# Altium PCB LedBlinker End Copper.PcbDoc
Units mil, origin at the board's own origin, x right, y up, seen from the top; angles counter-clockwise.
Board outline 1050 x 1050 mil, 2 copper layers (Top Layer, Bottom Layer), stack 64.8 mil thick; 27 components, 31 nets, 96 pads, 23 vias.
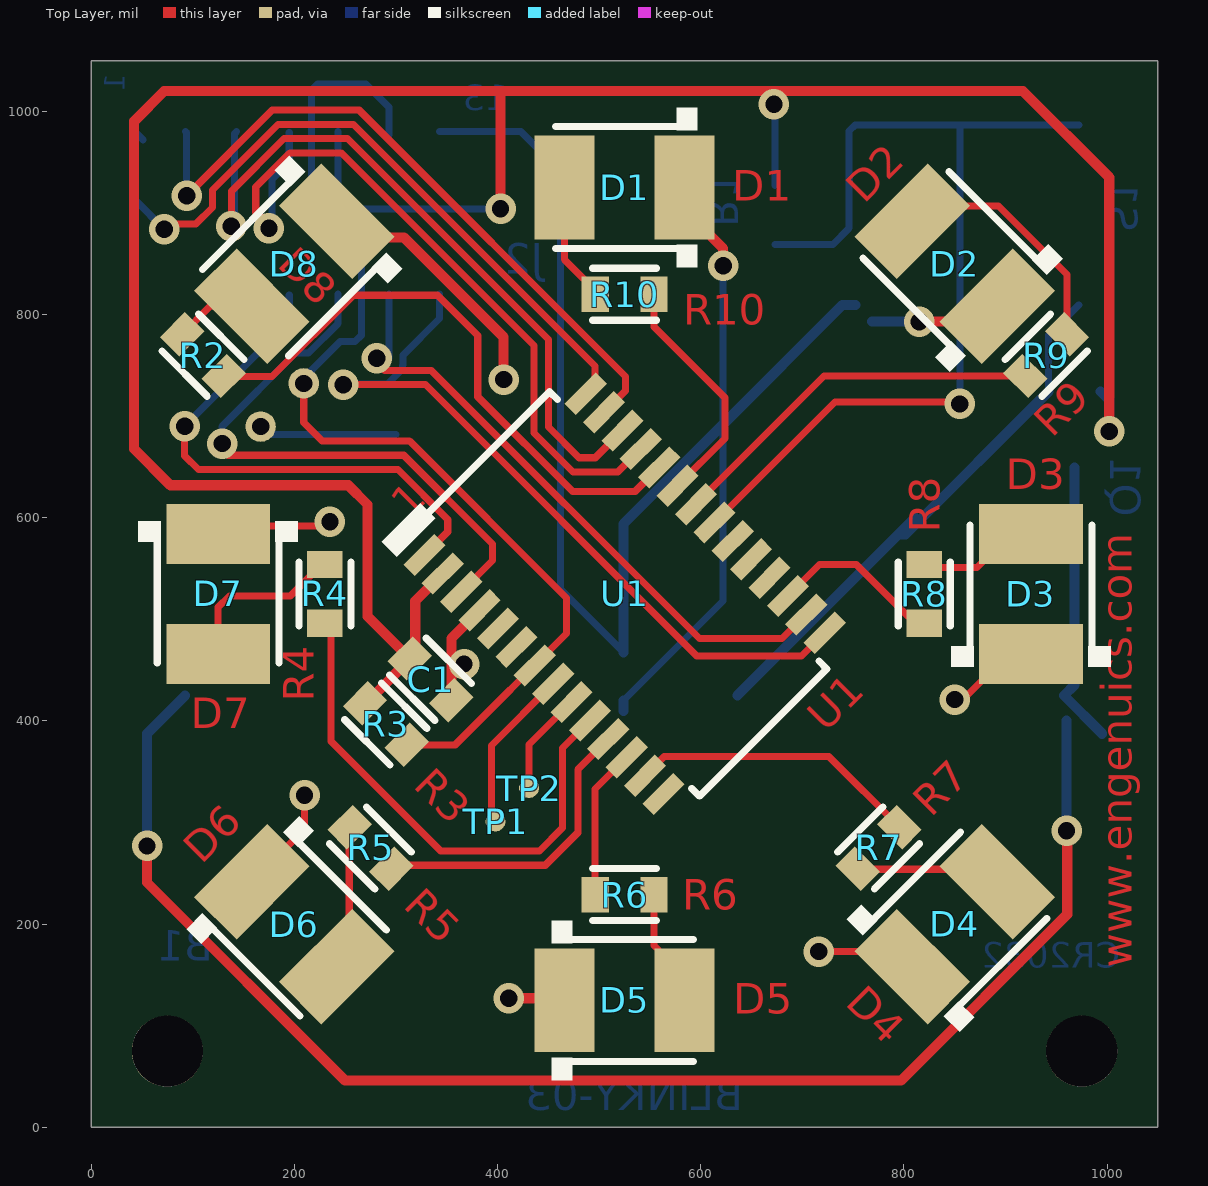
[diagram p0: Top Layer view]
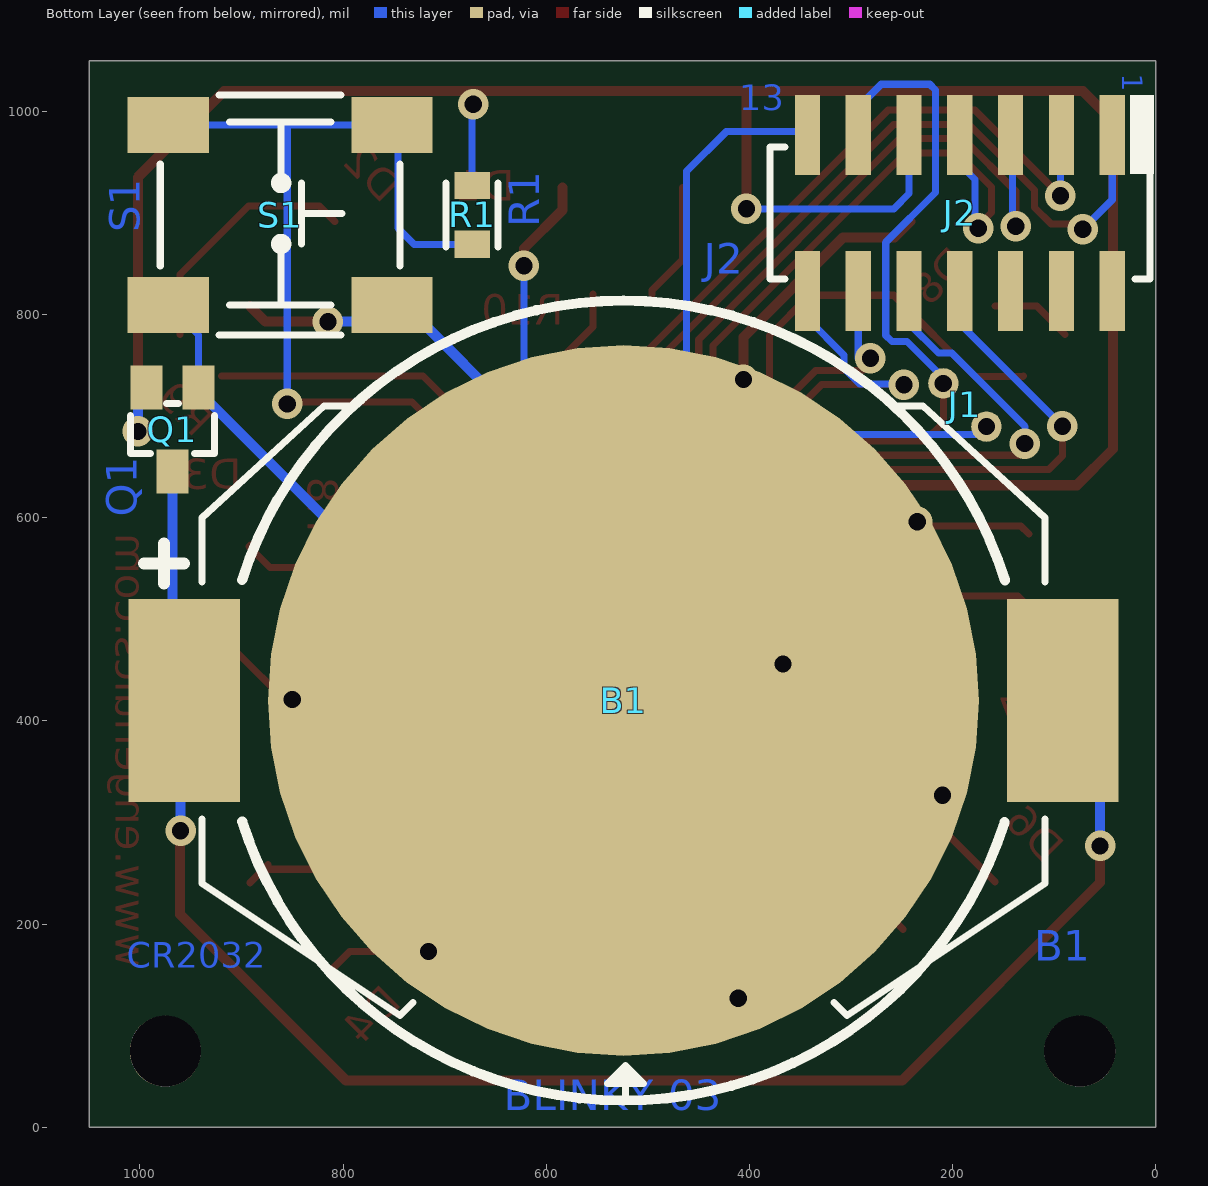
[diagram p1: Bottom Layer view, seen from below]

## Layer stack, top to bottom
Top Layer: signal copper 1.4
Dielectric: core 62, FR-4, Dk 4.8
Bottom Layer: signal copper 1.4

## Board outline
0,0 0,1050 1050,1050 1050,0

## Design rules (kind name [scope] priority, off if disabled: settings)
Clearance ClearancePolygon [All vs InPoly] p1: gap=20
Clearance [All] p2: gap=7
HoleSize [All] p1: absolutevalues=TRUE maxlimit=250 minlimit=17 maxpercent=80.000 minpercent=20.000
MinimumSolderMaskSliver [All] p1 off: minsoldermaskwidth=10
PolygonConnect PolygonConnectVia [All vs IsVia] p1: connectstyle=Direct reliefconductorwidth=10 reliefentries=4 polygonreliefangle="90 Angle" airgapwidth=10
PolygonConnect [All] p2: connectstyle=Relief reliefconductorwidth=10 reliefentries=4 polygonreliefangle="90 Angle" airgapwidth=10
RoutingVias [All] p1: holewidth=17 width=26 viastyle="Through Hole" minholewidth=17 minwidth=26 maxholewidth=200 maxwidth=250
SilkToSilkClearance [All] p1 off: silktosilkclearance=10
SilkToSolderMaskClearance SilkscreenOverComponentPads [IsPad] p1 off: minsilkscreentomaskgap=7 clearancetoexposedcopper=TRUE
SolderMaskExpansion [All] p1: expansion=0
Width [All] p1: maxlimit=250 minlimit=7 preferedwidth=10
24 further rules are at their usual default settings.

## Components (designator, comment, footprint, x,y, rotation, side; value= is the part's Value field where it differs from the comment)
B1 "CR2032" "CONN BATTERY HOLDER CR2032" 524,420 r180 bottom locked
C1 "1uF" 0603 334,441 r315 top
D1 "GRN" "PLCC-2 AK" 525,925 r90 top
D2 "RED" "PLCC-2 AK" 850,850 r45 top
D3 "GRN" "PLCC-2 AK" 925,525 r0 top
D4 "RED" "PLCC-2 AK" 850,200 r315 top
D5 "GRN" "PLCC-2 AK" 525,125 r270 top
D6 "RED" "PLCC-2 AK" 200,200 r225 top
D7 "GRN" "PLCC-2 AK" 125,525 r180 top
D8 "RED" "PLCC-2 AK" 200,850 r135 top
J1 "RESET PADS" "JUMPER POINTS" 188,711 r45 bottom
J2 "JTAG/SERIAL" "CONN 14POS 7X2 SMT FEMALE SMALL" 193,900 r270 bottom locked
Q1 "DMG1013" SC-70-3 968,687 r180 bottom
R1 "100k" 0603 673,898 r90 bottom
R2 "390R" 0603 110,760 r135 top
R3 "100k" 0603 290,397 r135 top
R4 "390R" 0603 230,525 r90 top
R5 "390R" 0603 275,275 r135 top
R6 "390R" 0603 525,229 r0 top
R7 "390R" 0603 775,275 r225 top
R8 "390R" 0603 820,525 r90 top
R9 "390R" 0603 940,760 r45 top
R10 "390R" 0603 525,820 r180 top
S1 "TL3301" "SWITCH TACT SMT TL3301 J LEAD" 862,898 r180 bottom
TP1 "A" "TEST POINT SMT TINY" 398,301 r90 top
TP2 "S" "TEST POINT SMT TINY" 431,334 r135 top
U1 "MSP430F2122" TSSOP28 525,525 r315 top

## Footprints (in the part's own frame and the unit in brackets; to place one, negate y for a bottom-side part, rotate by r counter-clockwise, add the part's x,y. Pads: shape width x height; smd on the part's side, far side on the other; paste and mask are expansions set on the pad)
0603 [mil]
  rect 27x35 smd: 1(-29,0) 2(29,0)
  silkscreen extent -31,-26 31,26
"CONN 14POS 7X2 SMT FEMALE SMALL" [mm]
  rect 2x0.63 smd: 1(-1.95,3.81) 2(1.95,3.81) 3(-1.95,2.54) 4(1.95,2.54) 5(-1.95,1.27) 6(1.95,1.27) 7(-1.95,0) 8(1.95,0) 9(-1.95,-1.27) 10(1.95,-1.27) 11(-1.95,-2.54) 12(1.95,-2.54) 13(-1.95,-3.81) 14(1.95,-3.81)
  silkscreen extent -2.95,-4.75 1.65,4.85
"CONN BATTERY HOLDER CR2032" [mm]
  rect 2.79x5.08 smd: +(-10.985,0) +(10.985,0)
  round 17.78 smd: -(0,0)
  silkscreen extent -11.99,-10 10.54,10
"JUMPER POINTS" [mil]
  round 30 hole 17: 1(-30,0) 2(30,0)
"PLCC-2 AK" [mil]
  rect 102x59 smd: A(0,59) K(0,-59)
  silkscreen extent -79,-72 79,68
SC-70-3 [mm]
  rect 0.8x1.1 smd paste+0 mask+0: 1(0.65,1.05) 2(-0.65,1.05) 3(0,-1.05)
  silkscreen extent -1.05,-0.6 1.05,0.65
"SWITCH TACT SMT TL3301 J LEAD" [mil]
  rect 80x55 smd: 1(-110,-88.5) 2(110,-88.5) 3(-110,88.5) 4(110,88.5)
  silkscreen extent -118,-118 118,118
"TEST POINT SMT TINY" [mm]
  round 0.5 smd paste-100: 1(0,0)
TSSOP28 [mm]
  rect 0.4x1.1 smd: 1(-4.225,-2.85) 2(-3.575,-2.85) 3(-2.925,-2.85) 4(-2.275,-2.85) 5(-1.625,-2.85) 6(-0.975,-2.85) 7(-0.325,-2.85) 8(0.325,-2.85) 9(0.975,-2.85) 10(1.625,-2.85) 11(2.275,-2.85) 12(2.925,-2.85) 13(3.575,-2.85) 14(4.225,-2.85) 15(4.225,2.85) 16(3.575,2.85) 17(2.925,2.85) 18(2.275,2.85) 19(1.625,2.85) 20(0.975,2.85) 21(0.325,2.85) 22(-0.325,2.85) 23(-0.975,2.85) 24(-1.625,2.85) 25(-2.275,2.85) 26(-2.925,2.85) 27(-3.575,2.85) 28(-4.225,2.85)
  silkscreen extent -5.23,-3.38 4.9,2.25

## Part data
B1: library part "CONN BATTERY HOLDER CR2032", "3V Coincell Battery"
C1: library part "CAPACITOR NON-POLARIZED"
D1 D2 D3 D4 D5 D6 D7 D8: library part "LED AK"
J1: library part "CONN SIP 2"
J2: library part "CONN JTAG/SERIAL DEBUG 14POS FEMALE"
Q1: library part "TRANS PMOS 1G 2S 3D"
R1 R2 R3 R4 R5 R6 R7 R8 R9 R10: library part RESISTOR
S1: library part "SWITCH SPST TL3301 JLEAD", "SPST TACT SWITCH"
TP1 TP2: library part "TEST POINT SMT"
U1: library part "MCU MSP430F2122 TSSOP28 LED BLINKER"

## Free pads (board coordinates)
  round 70 hole 70 unplated paste-100 mask-100: ""(75,75) ""(975,75)

## Via types
v1: diameter 30, hole 17, Top Layer to Bottom Layer, tented both sides, 23 vias

## Nets (pads, with @x,y where several pads share a name; then routed paths per layer and width w, separated by ;. In a path a pad name is that pad's centre, name@x,y a point inside that pad or via, vN(x,y) a via of type N, cw(c..) or ccw(c..) an arc to the next point about the centre after c; other vN are vias at no path point)
GND: B1.- C1.2 D1.K D2.K D3.K D4.K D5.K D6.K D7.K D8.K J1.1 J2.13 Q1.1 S1.1 S1.2 U1.4 | length 3277.2
  Top Layer w7: D7.K 133,592 v1@235,592 ; D6.K 210,293.44 v1(210,327) ; v1(716,173) 793.56,173 D4.K ; v1(850,421) 858,421 903,466 D3.K
  Top Layer w10: D8.K 257.44,876 307.68,876 406,777.68 v1(406,736) ; C1.2 354.51,481.17 U1.4 ; v1(411,127) D5.K@461,127 ; D1.K 584,903 622,865 v1@622,852 ; v1(815,793) 876.44,793 D2.K
  Bottom Layer w7: J1.1@166,682 B1.-@300,682 ; J2.13@343,980 423,980 462,941 462,529.57 B1.-@524,467.57 ; B1.- 622,518 622,692 v1(622,848) ; Q1.1@942.41,724.4 942.41,779.91 S1.1
  Bottom Layer w10: B1.-@524,410 B1.- ; B1.-@524,467.57 524,594 622,692 739.5,809.5 S1.2 ; B1.-@636,425 B1.-@794.5,583.5 ; S1.2@768.5,793 v1(815,793) ; B1.-@811,598 811,600 B1.-@794.5,583.5 ; Q1.1@942.41,724.4 801.51,583.5 B1.-@794.5,583.5
  other v1: 367,456 235,596
LED1: R10.1 U1.23 | length 236.8
  Top Layer w7: R10.1 554,788 623.86,718.14 623.86,678.14 U1.23
LED2: R9.1 U1.22 | length 376.4
  Top Layer w7: U1.22 721.4,739.49 R9.1
LED3: R8.1 U1.17 | length 172.4
  Top Layer w7: U1.17 716.86,554 753,554 814,493 R8.1@820,493
LED4: R7.1 U1.13 | length 286.9
  Top Layer w7: U1.13 564.05,365 726.01,365 R7.1
LED5: R6.1 U1.12 | length 148.1
  Top Layer w7: R6.1 496,333.14 U1.12
LED6: R5.1 U1.11 | length 298
  Top Layer w7: R5.1@299.01,258 447,258 479,290 479,352.33 U1.11
LED7: R4.1 U1.10 | length 517.4
  Top Layer w7: R4.1 236,490 236,380 344,272 441.2,272 464,294.8 464,373.52 U1.10
LED8: R2.1 U1.24 | length 587
  Top Layer w7: R2.1 131,739 178,739 258,819 341,819 380.5,779.5 380.5,719.1 473.6,626 535.52,626 U1.24
NetD1_A: D1.A R10.2 | length 117.4
  Top Layer w7: D1.A 466,854 496,824 R10.2
NetD2_A: D2.A R9.2 | length 245.5
  Top Layer w7: D2.A 823.56,907 893,907 960.51,839.49 R9.2
NetD3_A: D3.A R8.2 | length 83.2
  Top Layer w7: R8.2@820,551 872,551 892.54,571.54 D3.A@891.04,573.04
NetD4_A: D4.A R7.2 | length 148.6
  Top Layer w7: R7.2@753,254 D4.A@876.45,254 ; D4.A@873.94,258.49 D4.A@891.72,240.72
NetD5_A: D5.A R6.2 | length 116.4
  Top Layer w7: R6.2 554,179 584,149 D5.A
NetD6_A: D6.A R5.2 | length 101
  Top Layer w7: D6.A@249,195 D6.A@257.49,203.49 ; D6.A@254,204 R5.2@254,293.01
NetD7_A: D7.A R4.2 | length 168.4
  Top Layer w7: D7.A 125,512 136,523 196,523 227,554 R4.2
NetD8_A: D8.A R2.2 | length 80.3
  Top Layer w7: R2.2 117.27,808.28 D8.A
NetR1_1: R1.1 S1.3 S1.4 U1.21 | length 972
  Top Layer w7: U1.21 732.1,714 852,714 v1@857,709
  Bottom Layer w7: R1.1 730,869 746,885 746,980.5 S1.4 S1.3 ; v1(855,712) 855,985.5
NetTP1_1: TP1.1 U1.8 | length 157.8
  Top Layer w7: TP1.1@394,304 394,375.9 U1.8
NetTP2_1: TP2.1 U1.9 | length 101.8
  Top Layer w7: TP2.1 431,376.71 U1.9
PIMO: J2.12 U1.16 | length 612.6
  Top Layer w7: v1@278,756 289,745 334.8,745 598.8,481 680.05,481 U1.16
  Bottom Layer w7: v1@293,757 J2.12@293,820
  other v1: 281,757
POMI: J2.14 U1.15 | length 747.5
  Top Layer w7: v1(248,731) 329,731 596,464 699.24,464 U1.15
  Bottom Layer w7: v1(248,731) 248.5,731.5 291.56,731.5 306.5,746.44 306.5,749.7 307,750.2 307,760 343,796 J2.14@343,820
RST: J1.2 J2.11 R3.1 U1.7 | length 1063.6
  Top Layer w7: J1.2@209.21,733.21 J1.2 209.21,693.79 227.5,675.5 313.5,675.5 468,521 468,486.1 358.4,376.49 R3.1
  Bottom Layer w7: J1.2 209.21,737.41 245.16,773.36 259.75,773.36 265.9,779.51 265.9,871.1 217,920 217,1021 222.64,1026.64 270.36,1026.64 293,1004 J2.11
TCK: J2.7 U1.25 | length 732.9
  Top Layer w7: v1(175,885) 175,887.56 162,900.56 162,925.6 195.54,959.14 246.46,959.14 436,769.6 436,683.4 474.4,645 518.33,645 U1.25
  Bottom Layer w7: v1@178,882 178,933 195,950 J2.7@195,979
TDI: J2.3 U1.27 | length 682.8
  Top Layer w7: v1(94,917) 178.14,1001.14 263.86,1001.14 526,739 526,725.05 U1.27
  Bottom Layer w7: J2.3@93,980 94,979 v1(94,917)
TDO: J2.1 U1.28 | length 720.1
  Top Layer w7: v1@77,889 103,889 119.5,905.5 119.5,922.7 183.94,987.14 258.06,987.14 496,749.2 496,731.24 U1.28
  Bottom Layer w7: J2.1@51,972 43,980 43,913 v1@73,883
  other v1: 72,884
TEST: J2.8 U1.1 | length 530.2
  Top Layer w7: v1(92,690) 92,661 105.5,647.5 301.9,647.5 351,598.4 351,586.24 U1.1
  Bottom Layer w7: v1(92,690) 195,793 J2.8@195,819
TICK: J2.10 U1.3 | length 558.4
  Top Layer w7: v1@134.5,661.5 307.7,661.5 395,574.2 395,557.86 U1.3
  Bottom Layer w7: v1(129,673) 129,690 201,762 214,762 243,791 J2.10@243,820
TMS: J2.5 U1.26 | length 723.3
  Top Layer w7: v1(138,887) 138,921.4 189.74,973.14 252.26,973.14 450,775.4 450,689.2 480.2,659 496.14,659 U1.26
  Bottom Layer w7: v1@141,890 141,978 J2.5@143,980
VBAT: B1.+ Q1.3 | length 1726.9
  Top Layer w10: v1(55,277) 55,241 250,46 797,46 960.64,209.64 960.64,291.36 v1(960,292)
  Bottom Layer w10: v1(55,277) 55,387.48 B1.+@92.52,425 ; v1(960,292) B1.+@960,400.48 ; Q1.3@968,649.6 968,435.52 957.48,425 B1.+@995,387.48
VCC: C1.1 J2.9 Q1.2 R1.2 R3.2 U1.2 | length 2632.5
  Top Layer w10: R3.2@270.49,417.51 C1.1@320,467.01 ; C1.1@320.49,468.51 C1.1@325,464 ; U1.2 319,518.05 319,467.01 C1.1 272,503 272,613 253,632 78,632 42.32,667.68 42.32,990.32 72,1020 917,1020 1002,935 v1(1002,685) ; v1(403,904) 403,1020
  Bottom Layer w7: J2.9@243,980 243,919 258,904 v1(403,904) ; R1.2 v1@673,999
  Bottom Layer w10: Q1.2@993.59,724.4 1002,715.99 v1(1002,685)
  other v1: 672,1007
pads on no net: J2.2 J2.4 J2.6 U1.5 U1.6 U1.14 U1.18 U1.19 U1.20

## Other copper
Top Layer:
  text "1" at 313,598 h30 r45
  text "www.engenuics.com" at 1024,157 h30 r90
Bottom Layer:
  text "13" at 410,1001 h25
  text "CR2032" at 1013,157 h25
  text "BLINKY-03" at 642,17 h30

## Silkscreen, mask and mechanical layers (free items; w line width, h text height)
Mechanical 1:
  the board outline again, w7
Mechanical 4:
  text "RESET" at 201,762 h20 r45
Mechanical 5:
  region: 599,983 599,1003 574,1003 574,983
  region: 599,843 599,863 574,863 574,843
  region: 741.4,204.54 755.54,190.39 773.22,208.07 759.08,222.21
  region: 840.39,105.54 854.54,91.4 872.21,109.08 858.07,123.22
  region: 451,65 451,45 476,45 476,65
  region: 451,205 451,185 476,185 476,205
  region: 204.54,309.6 190.39,295.46 208.07,277.78 222.21,291.92
  region: 105.54,210.61 91.4,196.46 109.08,178.79 123.22,192.93
  rectangle: 845,451 865,476
  rectangle: 985,451 1005,476
  region: 65,599 45,599 45,574 65,574
  region: 205,599 185,599 185,574 205,574
  region: 209.61,944.46 195.46,958.6 177.79,940.92 191.93,926.78
  region: 308.6,845.46 294.46,859.61 276.78,841.93 290.92,827.79
  region: 944.46,840.39 958.6,854.54 940.92,872.21 926.78,858.07
  region: 845.46,741.4 859.61,755.54 841.93,773.22 827.79,759.08
  region: 343,596 326.74,612.26 288.55,574.08 304.82,557.82
  lines w7: 329.02,594.42 453.47,718.87 ; 454.02,718.42 458.97,713.47 ; 590.65,334.21 596.31,328.55 720.76,453 715.1,458.66 ; 65,439 65,609 185,609 185,454 185,439 65,439 ; 96.47,217.68 181.32,302.53 301.53,182.32 216.68,97.47 107.08,207.07 96.47,217.68 ; 96.47,831.32 216.68,951.53 301.53,866.68 191.93,757.08 181.32,746.47 96.47,831.32 ; 439,65 454,65 609,65 609,185 439,185 439,65 ; 442,863 457,863 612,863 612,983 442,983 442,863 ; 746.47,181.32 866.68,301.53 951.53,216.68 841.93,107.08 831.32,96.47 746.47,181.32 ; 746.47,868.68 831.32,953.53 951.53,833.32 866.68,748.47 757.08,858.07 746.47,868.68 ; 865,439 865,609 985,609 985,454 985,439 865,439
Mechanical 6:
  rectangle: 2,936 32,1016
  lines w5: 797,900 841,900 ; 841,866 841,934 ; 6,786 6,1014 380,1014 380,786 6,786 ; 744,780 980,780 980,1016 744,1016 744,780
  lines w7: 7,835 21,835 ; 109,305 109,239.33 303.6,109.6 322.5,128.5 ; 109,540 109,600.42 228.55,710 296,710 ; 365,835 379,835 ; 365,965 379,965 ; 508,99 538,99 533,104 513,104 ; 523,35.67 523,114 ; 727,126 744,109 939,239 939,310 ; 756,710 819.27,710 939,600.25 939,540 ; 523,114 503,94 543,94 523,114

## Dimensions
0,1050 to 1050,1050 on Mechanical 5
1050,1050 to 1050,0 on Mechanical 5

## Text inside footprints (layer, text, board x,y; h text height)
J2: Bottom Layer "1" at 33,1037 h20 r90